# Altium PCB PCB_工字.PcbDoc
Units mm, origin at the board's own origin, x right, y up, seen from the top; angles counter-clockwise.
Board outline 18.35 x 24.76 mm, 2 copper layers (Top Layer, Bottom Layer); 10 components, 12 nets, 47 pads, 13 vias.
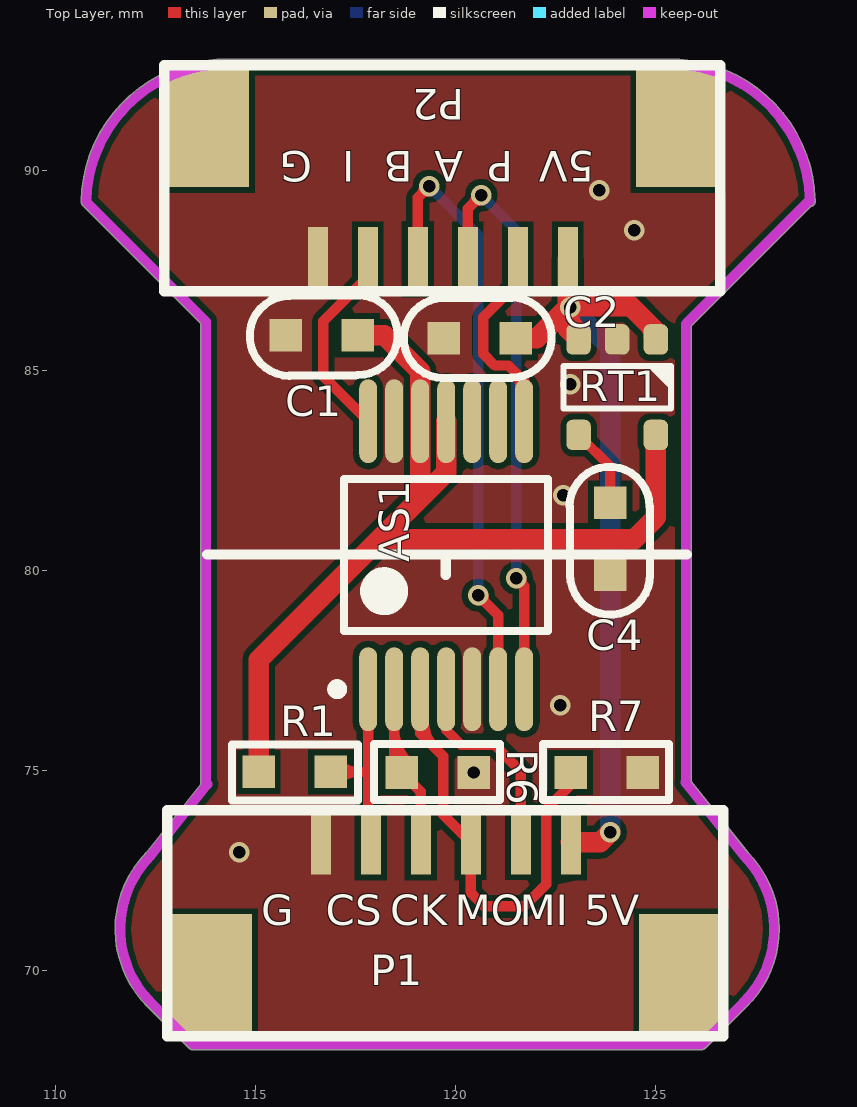
[diagram p0: Top Layer view]
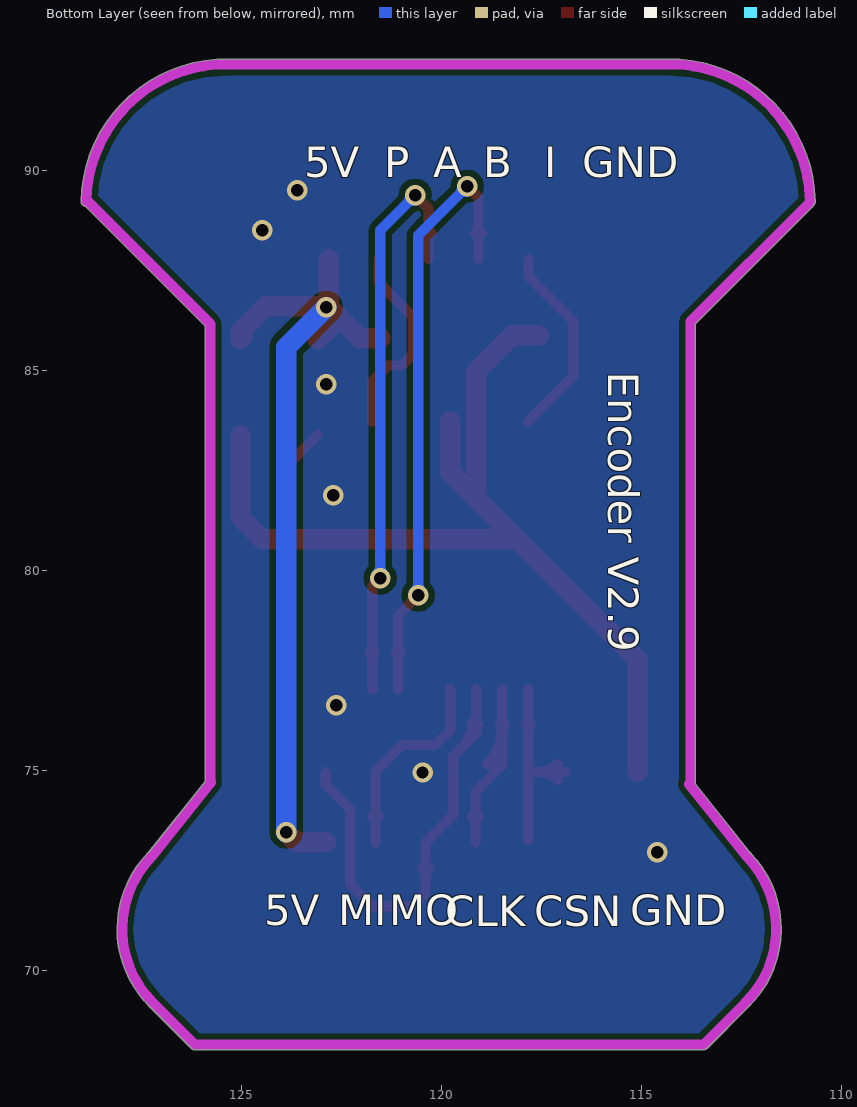
[diagram p1: Bottom Layer view, seen from below]
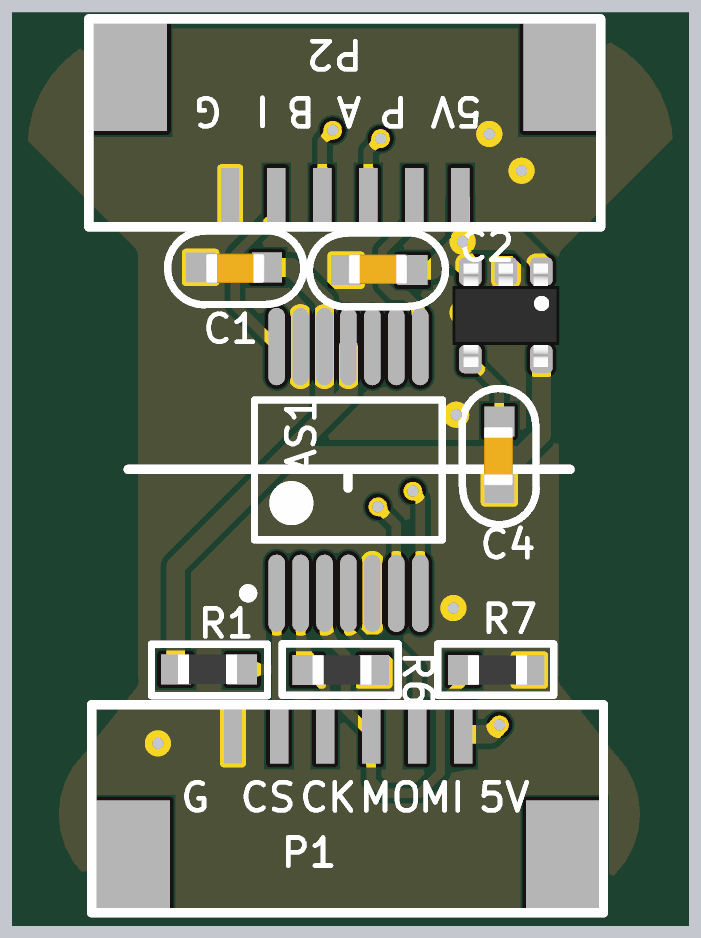
[diagram p2: 3D render of the assembled board from above, using the file's embedded part models]

## Layer stack, top to bottom
Top Solder: solder mask 0.0102, Solder Resist, Dk 3.5
Top Layer: signal copper 0.0356
Dielectric1: dielectric 0.32, FR-4, Dk 4.8
Bottom Layer: signal copper 0.0356
Bottom Solder: solder mask 0.0102, Solder Resist, Dk 3.5

## Board outline
112.315,69.084 ccw(c114.224,71.031) 112.316,69.084 112.315,69.084 cw(c114.224,71.031) 112.272,72.934 113.643,74.655 113.643,86.161 110.7,89.104 cw(c110.79,89.194) 110.671,89.148 cw(c110.777,89.219) 110.65,89.221 cw(c114.269,89.156) 114.335,92.775 cw(c114.333,92.648) 114.368,92.77 cw(c114.391,92.645) 114.391,92.772 125.275,92.772 cw(c125.275,92.645) 125.287,92.772 cw(c125.317,92.648) 125.315,92.775 cw(c125.381,89.155) 129,89.221 cw(c128.873,89.219) 129,89.219 cw(c128.873,89.219) 128.889,89.093 125.901,86.105 125.901,74.721 127.313,72.948 cw(c127.232,72.85) 127.323,72.939 cw(c125.376,71.031) 128.102,71.031 cw(c125.376,71.031) 127.285,69.084 cw(c125.376,71.031) 127.284,69.084 127.285,69.085 126.25,68.05 cw(c126.16,68.14) 126.16,68.013 cw(c126.16,68.14) 126.157,68.013 cw(c126.155,68.14) 126.155,68.013 113.44,68.013 cw(c113.44,68.14) 113.35,68.05

## Design rules (kind name [scope] priority, off if disabled: settings)
Clearance [All] p1: gap=0.152 ignorepadtopadclearanceinfootprint=FALSE except(0: Arc-Hole Track-Hole SMDPad-Hole THPad-Hole Via-Hole Fill-Hole Poly-Hole Region-Hole Text-Hole)
PlaneConnect [All] p1: planeconnectstyle=Direct reliefexpansion=0.508 reliefentries=4 reliefconductorwidth=0.254 reliefairgap=0.254
PolygonConnect [All] p1: connectstyle=Direct reliefconductorwidth=0.254 reliefentries=4 polygonreliefangle="90 Angle" airgapwidth=0.254
RoutingPriority [All] p1: routingpriority=1
RoutingPriority RoutingPriority_CLK [InNetClass('New Class')] p2: routingpriority=0
RoutingTopology [All] p1: topology=Daisy_MidDriven
RoutingVias [All] p1: holewidth=0.305 width=0.508 viastyle="Through Hole" minholewidth=0.305 minwidth=0.508 maxholewidth=0.711 maxwidth=1.27
SolderMaskExpansion [All] p1: expansion=0.102
Width Width_1 [All] p1: maxlimit=1.27 minlimit=0.254 preferedwidth=0.254 minimp=50.000000 maximp=50.000000 favimp=50.000000
Width Width_5V [InNet('5V')] p2: maxlimit=2.032 minlimit=0.254 preferedwidth=0.508 minimp=50.000000 maximp=50.000000 favimp=50.000000
27 further rules are at their usual default settings.

## Components (designator, comment, footprint, x,y, rotation, side; value= is the part's Value field where it differs from the comment)
AS1 "AS5047P" AS5047P 119.775,80.375 r90 top
C1 "Cap_0603" CAP_0603 116.725,85.9 r180 top
C2 "Cap_0603" CAP_0603 120.55,85.775 r0 top
C4 "Cap_0603" CAP_0603 123.9,80.725 r90 top
P1 "HDR1x6_2.54" 1.25mm_1X6_SMT#1 119.1,73.325 r0 top
P2 "HDR1x6_2.54" 1.25mm_1X6_SMT#2 119.025,87.65 r0 top
R1 "Res_0603" RES_0603 115.95,72.875 r180 top
R6 "Res_0603" RES_0603 119.6,77.025 r0 top
R7 "Res_0603" RES_0603 123.825,77.025 r0 top
RT1 "RT9193" SOT23-5 124.05,84.575 r270 top

## Footprints (in the part's own frame and the unit in brackets; to place one, negate y for a bottom-side part, rotate by r counter-clockwise, add the part's x,y. Pads: shape width x height; smd on the part's side, far side on the other; paste and mask are expansions set on the pad)
1.25mm_1X6_SMT#1 [mm]
  rect 2.1x3 smd: 0(-5.225,-3.425) 0(6.55,-3.425)
  rect 0.5x1.6 smd: 1(-2.46,-0.127) 2(-1.21,-0.127) 3(0.04,-0.127) 4(1.29,-0.127) 5(2.54,-0.127) 6(3.79,-0.127)
  silkscreen extent -6.3,-4.97 7.6,0.67
1.25mm_1X6_SMT#2 [mm]
  rect 2.1x3 smd: 0(-5.225,3.425) 0(6.55,3.425)
  rect 0.5x1.6 smd: 1(-2.46,0.127) 2(-1.21,0.127) 3(0.04,0.127) 4(1.29,0.127) 5(2.54,0.127) 6(3.79,0.127)
  silkscreen extent -6.3,-0.67 7.6,4.97
AS5047P [mm] "SOP, 14-Leads, Body 5.00x5.29mm, Pitch 0.65mm, IPC Medium Density"
  oval 2.1x0.45 smd: 1(-3.35,1.95) 2(-3.35,1.3) 3(-3.35,0.65) 4(-3.35,0) 5(-3.35,-0.65) 6(-3.35,-1.3) 7(-3.35,-1.95) 8(3.35,-1.95) 9(3.35,-1.3) 10(3.35,-0.65) 11(3.35,0) 12(3.35,0.65) 13(3.35,1.3) 14(3.35,1.95)
  silkscreen extent -3.47,-2.55 1.9,2.85, body extent -2.7,-2.55 2.7,2.55, height 2.65
CAP_0603 [mil]
  rect 32x32 smd: 1(-33,1) 2(38,1)
  silkscreen extent -72,-38 73,41, body extent -30,-14 33,18, height 31
RES_0603 [mil]
  rect 32x32 smd: 1(-37,-82) 2(34,-82)
  silkscreen extent -64,-109 60,-54, body extent -31,-98 31,-66, height 18
SOT23-5 [mil]
  rrect50% 30x24 smd: 1(-47,38) 2(-47,0) 3(-47,-38) 4(47,-38) 5(47,38)
  silkscreen extent -21,-53 21,53, body extent -55,-57 55,57, height 57

## Part data
C1 C2 C4: "Capacitor"
P1 P2: library part HDR1x6_2.54T, "Header"
R1 R6 R7: "Resistor"
RT1: "Power"

## Via types
v1: diameter 0.508, hole 0.305, Top Layer to Bottom Layer, 13 vias

## Nets (pads, with @x,y where several pads share a name; then routed paths per layer and width w, separated by ;. In a path a pad name is that pad's centre, name@x,y a point inside that pad or via, vN(x,y) a via of type N, cw(c..) or ccw(c..) an arc to the next point about the centre after c; other vN are vias at no path point)
3V3: AS1.11 AS1.12 C1.1 R1.2 RT1.5 | length 25
  Top Layer w0.508: R1.2 115.086,77.761 118.1,80.775 ; C1.1 118.225,85.875 119.125,84.975 AS1.12 119.125,81.8 ; AS1.11 119.775,82.45 119.125,81.8 ; RT1.5 125.015,81.315 124.475,80.775 118.1,80.775 ; 118.1,80.775 119.125,81.8
5V: C2.2 P1.6 P2.6 RT1.1 RT1.3 | length 22.2
  Top Layer w0.508: C2.2 122.04,85.8 v1@122.815,86.575 ; P2.6 v1@122.815,86.6 ; P1.6 123.623,73.198 v1(123.875,73.45) ; RT1.3 122.815,86.039 v1@122.815,86.575 ; RT1.3@123.119,85.882 cw(c123.756,86.575) v1@122.815,86.575 ; 124.837,86.153 cw(c124.528,85.845) RT1.1@124.964,85.845 ; RT1.1 125.015,85.975 124.39,86.6 v1@122.815,86.6 ; v1@122.815,86.575 v1@122.815,86.6
  Bottom Layer w0.508: v1(122.875,86.575) 123.875,85.575 v1(123.875,73.45)
A: AS1.7 P2.4 | length 17.2
  Top Layer w0.254: P2.4@120.228,88.414 ccw(c120.018,88.624) 120.315,88.624 ccw(c120.612,88.624) P2.4@120.402,88.414 ; P2.4 120.315,89.04 v1(120.65,89.375) ; v1@120.523,89.375 cw(c120.216,89.375) 120.433,89.158 cw(c120.65,88.941) v1@120.65,89.248 ; v1(121.525,79.8) 121.725,79.6 ; v1@121.532,79.673 cw(c121.547,79.422) 121.725,79.6 ; v1@121.652,79.793 ccw(c121.903,79.778) 121.725,79.6 ; AS1.7@121.656,77.919 ccw(c121.488,78.087) 121.725,78.087 ccw(c121.962,78.087) AS1.7@121.794,77.919 ; AS1.7 121.725,79.6
  Bottom Layer w0.254: v1@120.65,89.248 cw(c120.65,88.941) 120.867,89.158 cw(c121.084,89.375) v1@120.777,89.375 ; v1(120.65,89.375) 121.525,88.5 v1(121.525,79.8) ; v1@121.435,79.89 ccw(c121.218,80.107) 121.525,80.107 ccw(c121.832,80.107) v1@121.615,79.89
B: AS1.6 P2.3 | length 18
  Top Layer w0.254: P2.3@118.978,88.414 ccw(c118.768,88.624) 119.065,88.624 ccw(c119.362,88.624) P2.3@119.152,88.414 ; P2.3 119.065,89.315 v1(119.35,89.6) ; v1@119.223,89.6 cw(c118.916,89.6) 119.133,89.383 cw(c119.35,89.166) v1@119.35,89.473 ; v1@120.575,79.248 cw(c120.575,78.941) 120.792,79.158 cw(c121.009,79.375) v1@120.702,79.375 ; v1(120.575,79.375) 121.075,78.875 AS1.6 ; AS1.6@121.006,77.919 ccw(c120.838,78.087) 121.075,78.087 ccw(c121.312,78.087) AS1.6@121.144,77.919
  Bottom Layer w0.254: v1@119.35,89.473 cw(c119.35,89.166) 119.567,89.383 cw(c119.784,89.6) v1@119.477,89.6 ; v1(119.35,89.6) 120.575,88.375 v1(120.575,79.375) ; v1@120.485,79.465 ccw(c120.268,79.682) 120.575,79.682 ccw(c120.882,79.682) v1@120.665,79.465
CLK: AS1.2 P1.3 R6.1 | length 6.5
  Top Layer w0.254: AS1.2@118.406,76.131 cw(c118.238,75.963) 118.475,75.963 cw(c118.712,75.963) AS1.2@118.544,76.131 ; 118.475,75.451 ccw(c119.169,75.451) R6.1@118.678,74.96 ; AS1.2@118.475,76.064 ccw(c119.782,76.064) R6.1@118.858,75.14 ; AS1.2 118.475,75.127 R6.1 119.14,74.462 P1.3 ; P1.3@119.053,73.835 ccw(c118.843,74.045) 119.14,74.045 ccw(c119.437,74.045) P1.3@119.227,73.835
CSN: AS1.1 P1.2 R1.1 | length 6.1
  Top Layer w0.254: R1.1 117.758,74.958 ; R1.1@117.087,74.76 cw(c117.564,74.283) 117.564,74.958 cw(c117.564,75.632) R1.1@117.087,75.155 ; AS1.1@117.756,76.131 cw(c117.588,75.963) 117.825,75.963 cw(c118.062,75.963) AS1.1@117.894,76.131 ; P1.2@117.825,73.263 AS1.1
GND: AS1.5 AS1.13 C1.2 C2.1 C4.1 P1.1 P2.1 R6.2 R7.2 RT1.2
  other v1: 114.6,72.95 120.464,74.942 122.625,76.625 122.7,81.875 122.875,84.65 124.475,88.5 123.6,89.5
I: AS1.14 P2.2 | length 5
  Top Layer w0.254: P2.2 117.815,87.34 116.7,86.225 116.7,84.85 AS1.14
MISO: AS1.4 P1.5 | length 5.6
  Top Layer w0.254: AS1.4 119.775,76.003 120.15,75.628 120.986,75.628 121.64,74.974 P1.5 ; P1.5@121.553,73.835 ccw(c121.343,74.045) 121.64,74.045 ccw(c121.937,74.045) P1.5@121.727,73.835
MOSI: AS1.3 P1.4 R7.1 | length 12.5
  Top Layer w0.254: AS1.3@119.056,76.131 cw(c118.888,75.963) 119.125,75.963 cw(c119.362,75.963) AS1.3@119.194,76.131 ; AS1.3 119.125,75.925 119.7,75.35 119.7,73.888 P1.4 120.39,71.935 120.725,71.6 121.725,71.6 122.275,72.15 122.275,74.028 122.885,74.638 R7.1 ; AS1.3@119.223,76.2 ccw(c120.123,76.2) 119.487,75.563 ; P1.4@120.303,72.561 cw(c120.093,72.351) 120.39,72.351 cw(c120.687,72.351) P1.4@120.477,72.561
NetC4_2: C4.2 RT1.4 | length 2
  Top Layer w0.254: RT1.4 123.875,82.591 C4.2
PWM: AS1.8 P2.5 | length 5.6
  Top Layer w0.254: 121.434,85.016 cw(c120.968,84.55) AS1.8@121.627,84.55 ; P2.5 121.565,87.19 120.7,86.325 120.7,85.408 120.993,85.115 121.335,85.115 121.725,84.725 AS1.8
pads on no net: AS1.9 AS1.10 P1.0 P2.0

## Polygon pours and split planes (outlines as drawn)
GND on Top Layer "Top Layer-No Net" (solid, remove dead copper, pour order 4): 132.25,64.675 131.075,65.85 104.475,65.85 104.475,94.75 105.55,95.825 106.25,96.525 142.45,96.525
GND on Bottom Layer "Top Layer-No Net" (solid, remove dead copper, pour order 6): 134.5,65.275 110.675,65.275 110.3,65.65 109.35,66.6 109.35,98.15 131.85,98.15 133.175,96.825

## Keep-outs
Keep-Out Layer:
  lines w0.254: 110.777,89.219 cw(c114.269,89.156) 114.333,92.648 ; 110.79,89.194 113.77,86.214 113.77,74.648 ; 113.8,74.648 112.368,72.85 ccw(c114.224,71.031) 112.405,69.175 113.44,68.14 126.155,68.14 126.16,68.14 127.195,69.175 ccw(c125.376,71.031) 127.232,72.85 ; 114.391,92.645 125.275,92.645 ; 125.317,92.648 cw(c125.381,89.155) 128.873,89.219 ; 125.755,74.7 127.23,72.848 ; 125.774,74.675 125.774,86.158 128.836,89.22

## Silkscreen, mask and mechanical layers (free items; w line width, h text height)
Top Overlay:
  lines w0.254: 113.792,80.391 125.792,80.391 ; 119.762,79.883 119.762,80.391
  text "G" at 116.425,90.475 h0.76 r180
  text "B" at 118.94,90.475 h0.76 r180
  text "A" at 120.198,90.475 h0.76 r180
  text "P" at 121.456,90.475 h0.76 r180
  text "5V" at 123.475,90.475 h0.76 r180
  text "I" at 117.175,89.713 h0.76
  text "G" at 115.15,71.125 h0.76
  text "CS" at 116.765,71.125 h0.76
  text "CK" at 118.38,71.125 h0.76
  text "MO" at 119.995,71.125 h0.76
  text "MI" at 121.61,71.125 h0.76
  text "5V" at 123.225,71.125 h0.76
Bottom Overlay:
  text "GND" at 116.475,89.825 h0.76
  text "I" at 117.425,89.825 h0.76
  text "B" at 118.95,89.825 h0.76
  text "A" at 120.2,89.825 h0.76
  text "P" at 121.425,89.825 h0.76
  text "5V" at 123.425,89.825 h0.76
  text "Encoder V2.9" at 115.824,84.963 h0.76 r90
  text "GND" at 115.275,71.125 h0.76
  text "MO" at 121.3,71.125 h0.76
  text "MI" at 122.575,71.125 h0.76
  text "5V" at 124.425,71.125 h0.76
  text "CSN" at 117.675,71.1 h0.76
  text "CLK" at 119.9,71.1 h0.76
Mechanical 13:
  lines w0.254: 125.756,80.674 ccw(c119.762,80.391) 125.76,80.561 ; 128.753,80.808 ccw(c119.762,80.391) 128.757,80.706

## Dimensions
113.77,86.06 to 125.774,86.24 on Mechanical 13
119.775,80.875 to 113.77,86.06 on Mechanical 1
125.792,80.391 to 114.391,92.645 on Mechanical 13
125.275,92.645 to 126.155,68.14 on Mechanical 13